# Altium PCB PCB1.PcbDoc
Units mm, origin at the board's own origin, x right, y up, seen from the top; angles counter-clockwise.
Board outline 98.12 x 55.73 mm, 2 copper layers (Top Layer, Bottom Layer); 32 components, 28 nets, 148 pads, 16 vias.
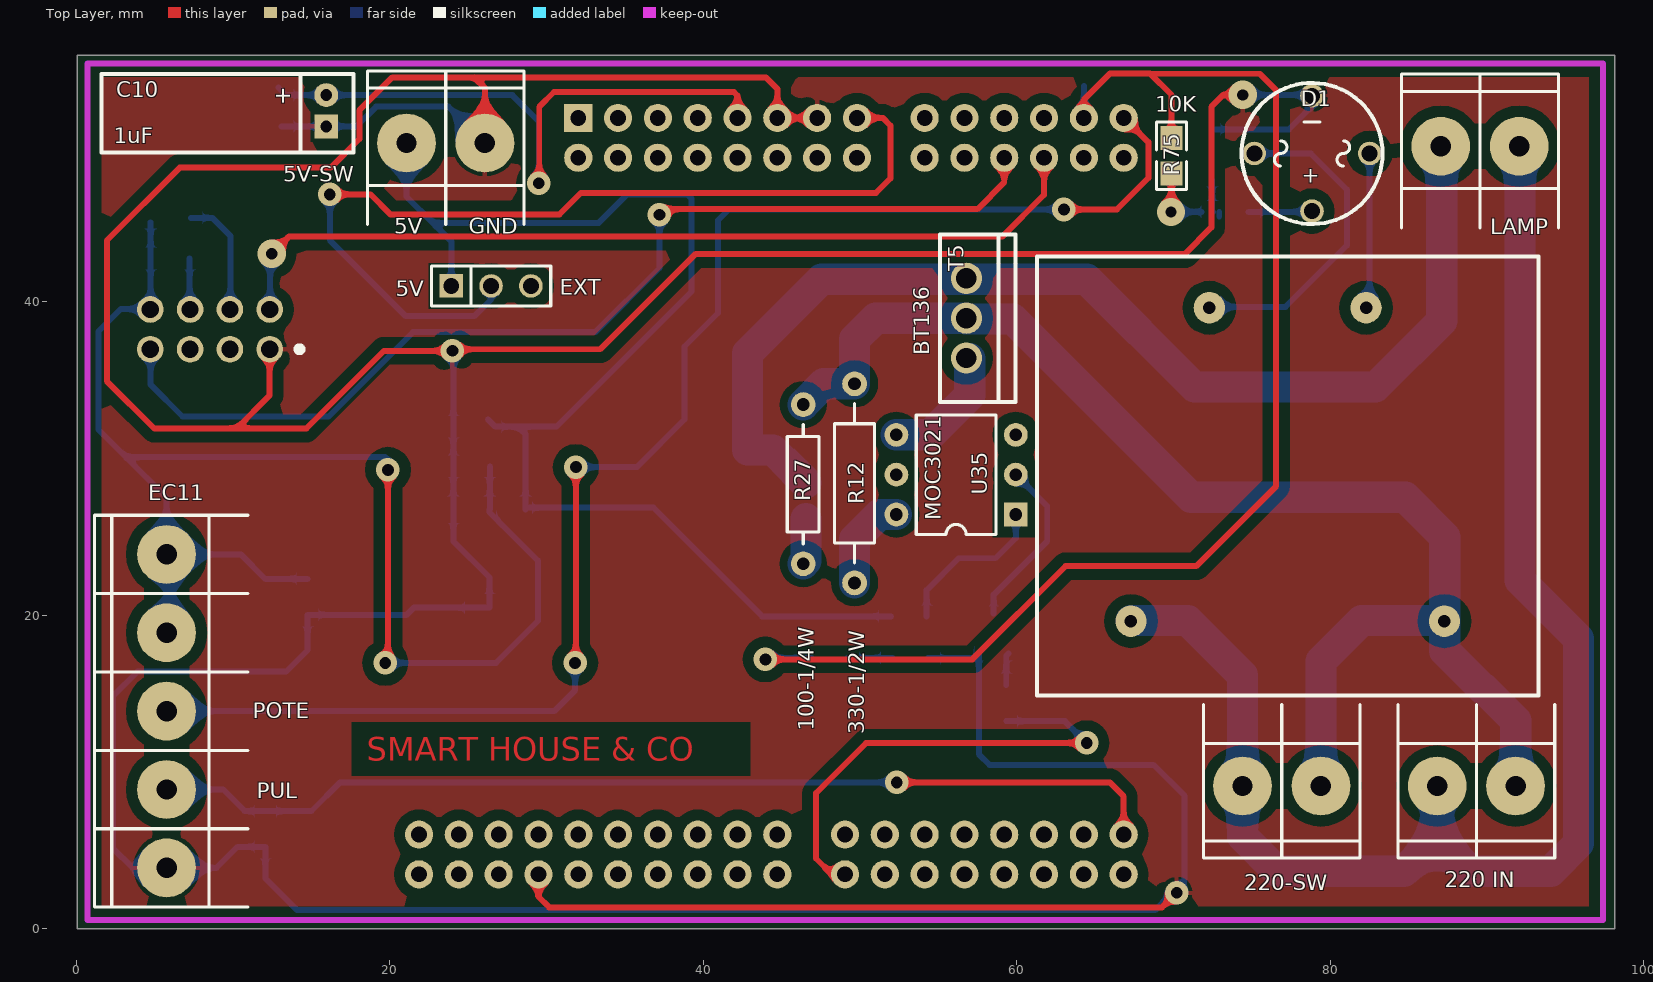
[diagram p0: Top Layer view]
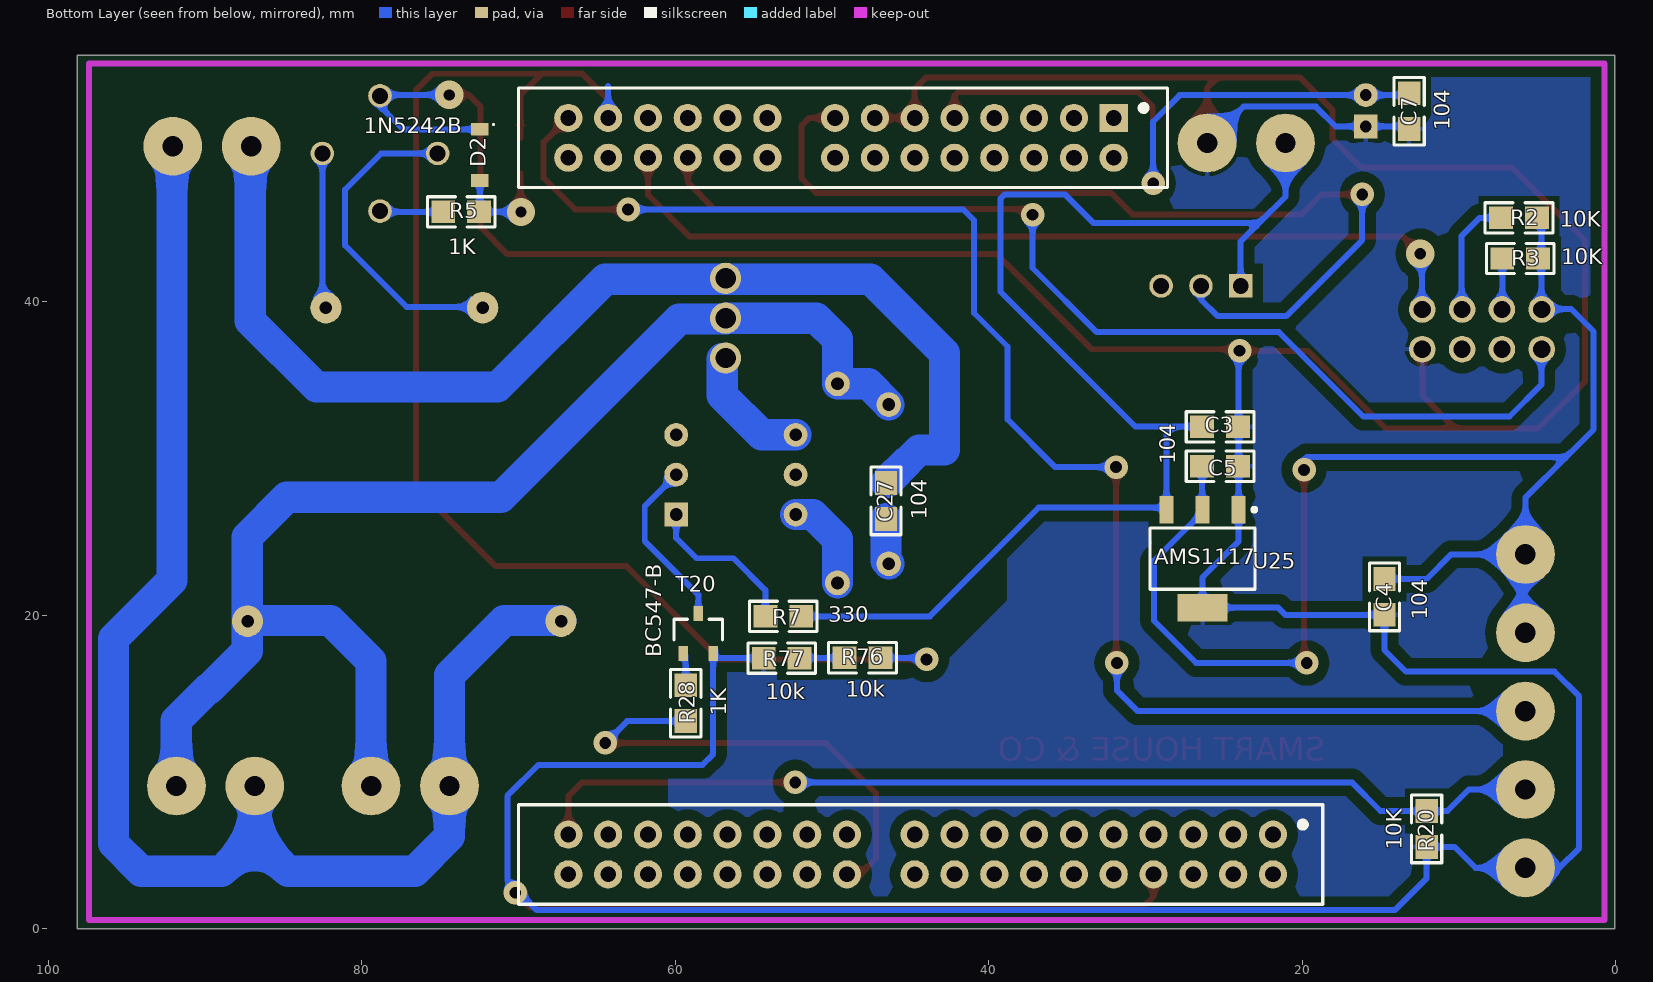
[diagram p1: Bottom Layer view, seen from below]

## Layer stack, top to bottom
Top Solder: solder mask 0.0102, Solder Resist, Dk 3.5
Top Layer: signal copper 0.0356
Dielectric 1: dielectric 0.32, FR-4, Dk 4.8
Bottom Layer: signal copper 0.0356
Bottom Solder: solder mask 0.0102, Solder Resist, Dk 3.5

## Board outline
0.051,0 98.171,0 98.171,55.728 0.051,55.728

## Design rules (kind name [scope] priority, off if disabled: settings)
Clearance POLYGON [All vs InPolygon] p1: gap=0.7
Clearance [All] p2: gap=0.254
PolygonConnect [All] p1: connectstyle=Relief reliefconductorwidth=0.254 reliefentries=4 polygonreliefangle="90 Angle" airgapwidth=0.254
RoutingVias [All] p1: holewidth=0.711 width=1.27 viastyle="Through Hole" minholewidth=0.711 minwidth=1.27 maxholewidth=0.711 maxwidth=1.27
SolderMaskExpansion [All] p1: expansion=0.102
UnpouredPolygon [All] p1: allowunpoured=FALSE
Width [All] p1: maxlimit=2 minlimit=0.254 preferedwidth=0.381 minimp=50.000000 maximp=50.000000 favimp=50.000000
29 further rules are at their usual default settings.

## Classes and differential pairs
component class esq: C3 C4 C5 C7 C10 C27 D1 D2 R2 R3 R5 R7 R12 R20 R27 R28 R75 R76 R77 T5 T20 U6 U25 U35 ""

## Components (designator, comment, footprint, x,y, rotation, side; value= is the part's Value field where it differs from the comment)
* "TRAFO" trafo 93.294,42.875 r180 top
C3 "" 0805 25.248,32.004 r180 bottom
C4 "104" 0805 14.757,21.158 r90 bottom
C5 "104" 0805 25.248,29.489 r180 bottom
C7 "104" 0805 13.183,52.146 r90 bottom
C10 "1uF" CAP100RP 15.951,52.172 r270 top
C27 "104" 0805 46.558,27.28 r90 bottom
D1 "" "PUENTE - W10M" 78.842,45.771 r180 top
D2 "1N5242B" Diodo 72.466,49.352 r270 bottom
J1 "220 IN" BORNERA2 89.332,9.093 r90 top
J2 "LAMP" BORNERA2 89.56,49.911 r270 top
J3 "220-SW" BORNERA2 76.911,9.093 r90 top
J4 "5V-SW" BORNERA2 23.571,50.114 r270 top
J20 "" JUMPER3 26.467,40.996 r0 top
J25 "EC11" BORNERA5 5.766,13.868 r0 top
R2 "10K" 0805 6.172,45.339 r0 bottom
R3 "10K" 0805 6.096,42.748 r0 bottom
R5 "1K" 0805 73.66,45.72 r180 bottom
R7 "330" 0805 53.111,19.914 r0 bottom
R12 "330-1/2W" RES500 49.657,22.047 r90 top
R20 "10K" 0805 12.065,6.35 r90 bottom
R27 "100-1/4W" RES400 46.38,23.266 r90 top
R28 "1K" 0805 59.334,14.376 r90 bottom
R75 "10K" 0805 69.875,49.301 r90 top
R76 "10k" 0805 48.057,17.272 r180 bottom
R77 "10k" 0805 53.213,17.247 r180 bottom
T5 "BT136" BT136 56.794,38.938 r270 top
T20 "BC547-B" SOT23 59.482,17.551 r180 bottom
U4 "" MICRO 45.872,28.473 r0 bottom
U6 "" ESP-01 12.344,39.497 r180 top
U25 "AMS1117" AMS1117 26.365,23.597 r270 bottom
U35 "MOC3021" MOC3021 59.944,26.467 r180 top

## Footprints (in the part's own frame and the unit in brackets; to place one, negate y for a bottom-side part, rotate by r counter-clockwise, add the part's x,y. Pads: shape width x height; smd on the part's side, far side on the other; paste and mask are expansions set on the pad)
0805 [mil] "Pasivo 0805"
  rect 60x56 smd: 1(-45,0) 2(45,0)
  silkscreen extent -85,-38 85,38, body extent -39,-25 39,25, height 15
AMS1117 [mm] "SOT223, 4-Leads, Body 6,50x7,00mm (avg), Pitch 2,30mm, IPC Medium Density"
  rect 1.75x0.9 smd: 1(-3.125,-2.3) 2(-3.125,2.3) 3(-3.125,0)
  rect 1.75x3.2 smd: 2(3.125,0)
  silkscreen extent -3.25,-3.35 1.95,3.42, body extent -3.48,-3.25 3.48,3.25, height 1.7
BORNERA2 [mm] "Bornera con Tornillos 5mm separaci�n"
  round 3.75 hole 1.3: 1(0,2.5) 2(0,-2.5)
  silkscreen extent -4.6,-5 5.2,5, body extent -3.76,-4.89 3.94,5.61, height 10
BORNERA5 [mm] "Bornera con Tornillos 5mm separaci�n"
  round 3.75 hole 1.3: 1(0,10) 2(0,5) 3(0,0) 4(0,-5) 5(0,-10)
  silkscreen extent -4.6,-12.5 5.2,12.5, body extent -3.76,-12.39 3.94,13.11, height 10.05
BT136 [mm]
  round 2 hole 1.3: 1(-2.54,0) 2(0,0) 3(2.54,0)
  silkscreen extent -5.33,-1.69 5.34,3.14, body extent -5.21,-1.65 5.46,3.18, height 22.76
CAP100RP [mil] "Body diameter 5mm"
  round 60 hole 30: 1(-39.37,0)
  rect 60x60 hole 30: 2(39.37,0)
  silkscreen extent -92,-565 105,68, body extent -97,-566 107,-65, height 220
Diodo [mm] "SODFL, 2-Leads, Body 1,60x3,60mm, IPC Medium Density"
  rect 0.81x1.12 smd: 1(-1.635,0) 2(1.635,0)
  silkscreen extent -1.99,0.81 -1.89,0.91, body extent -1.4,-0.85 1.4,0.85, height 1.3
ESP-01 [mm]
  round 1.7 hole 1.1: 1(0,2.54) 2(2.54,2.54) 3(5.08,2.54) 4(7.62,2.54) 5(0,0) 6(2.54,0) 7(5.08,0) 8(7.62,0)
  silkscreen extent -2.16,2.29 -1.65,2.79, body extent -3.43,-1.52 11.07,23.28, height 14.88
JUMPER3 [mm]
  rect 1.5x1.5 hole 1.016: 1(-2.54,0)
  round 1.5 hole 1.016: 2(0,0) 3(2.54,0)
  silkscreen extent -3.81,-1.27 3.81,1.27, body extent -3.81,-1.3 3.81,1.27, height 16.15
MICRO [mm]
  rect 1.8x1.8 hole 1: 1(-13.843,-23.241)
  round 1.8 hole 1: 2(-13.843,-20.701) 3(-11.303,-23.241) 4(-11.303,-20.701) 5(-8.763,-23.241) 6(-8.763,-20.701) 7(-6.223,-23.241) 8(-6.223,-20.701) 9(-3.683,-23.241) 10(-3.683,-20.701) 11(-1.143,-23.241) 12(-1.143,-20.701) 13(1.397,-23.241) 14(1.397,-20.701) 15(3.937,-23.241) 16(3.937,-20.701) 17(8.255,-23.241) 18(8.255,-20.701) 19(10.795,-23.241) 20(10.795,-20.701) 21(13.335,-23.241) 22(13.335,-20.701) 23(15.875,-23.241) 24(15.875,-20.701) 25(18.415,-23.241) 26(18.415,-20.701) 27(20.955,-23.241) 28(20.955,-20.701) 29(-24.003,22.479) 30(-24.003,25.019) 31(-21.463,22.479) 32(-21.463,25.019) 33(-18.923,22.479) 34(-18.923,25.019) 35(-16.383,22.479) 36(-16.383,25.019) 37(-13.843,22.479) 38(-13.843,25.019) 39(-11.303,22.479) 40(-11.303,25.019) 41(-8.763,22.479) 42(-8.763,25.019) 43(-6.223,22.479) 44(-6.223,25.019) 45(-3.683,22.479) 46(-3.683,25.019) 47(-1.143,22.479) 48(-1.143,25.019) 49(3.175,22.479) 50(3.175,25.019) 51(5.715,22.479) 52(5.715,25.019) 53(8.255,22.479) 54(8.255,25.019) 55(10.795,22.479) 56(10.795,25.019) 57(13.335,22.479) 58(13.335,25.019) 59(15.875,22.479) 60(15.875,25.019) 61(18.415,22.479) 62(18.415,25.019) 63(20.955,22.479) 64(20.955,25.019)
  silkscreen extent -27.18,-25.15 24.13,26.92, body extent -25.27,-24.51 22.23,26.29, height 1.5
MOC3021 [mil]
  rect 60x60 hole 32: 1(0,2)
  round 60 hole 32: 2(0,-98) 3(0,-198) 4(300,-198) 5(300,-98) 6(300,2)
  silkscreen extent 50,-248 250,52, body extent -5,-267 305,79, height 209
"PUENTE - W10M" [mm]
  round 1.5 hole 1.016: 1(0,0) 2(-3.677,-3.677) 3(0,-7.354) 4(3.677,-3.677)
  silkscreen extent -4.5,-8.18 4.5,0.82, body extent -6.58,-10.13 6.58,3.02, height 5.6
RES400 [mil]
  round 62 hole 32: 1(0,0) 2(400,0)
  silkscreen extent 50,-40 350,40, body extent -12,-45 412,46, height 96
RES500 [mil]
  round 62 hole 32: 1(0,0) 2(500,0)
  silkscreen extent 50,-50 450,50, body extent -5,-52 505,54, height 119
SOT23 [mm]
  rect 0.6x0.95 smd: 1(0,0) 2(0.95,2.55) 3(1.9,0)
  silkscreen extent -0.6,0.87 2.5,2.17, body extent -0.53,-0.25 2.47,2.88, height 1
trafo [mm]
  round 2 hole 0.8: 1(6.002,23.271) 5(26.002,23.271) 7(11.002,3.271) 9(21.002,3.271)
  silkscreen extent 0,0 32,28, body extent 0,0 32,28, height 36.58

## Part data
C3 C4 C5 C7 C27: library part CAP, "cap"
C10: library part CAPPOL, "Cap polarizado"
D1: library part PUENTE
D2: library part "DIODO SCHOTTKY", "Diodo"
J1 J2 J3 J4: library part Bornera_2, "Bornera de 2 pines"
J20: library part JUMPER3
J25: library part "BORNERA 5"
R2 R3 R5 R7 R12 R20 R27 R28 R75 R76 R77: library part RES, "Resistencia"
T20: library part "TRANSISTOR NPN"
U4: library part FRDM-KL25Z, "FRDM-KL25Z"
U6: library part ESP-01
U35: "OPTO-ACOPLADOR"

## Via types
v1: diameter 1.5, hole 0.75, Top Layer to Bottom Layer, 13 vias
v2: diameter 1.8, hole 0.711, Top Layer to Bottom Layer, 3 vias

## Nets (pads, with @x,y where several pads share a name; then routed paths per layer and width w, separated by ;. In a path a pad name is that pad's centre, name@x,y a point inside that pad or via, vN(x,y) a via of type N, cw(c..) or ccw(c..) an arc to the next point about the centre after c; other vN are vias at no path point)
3V3: C4.2 C5.1 J25.1 J25.2 R2.1 R3.1 U6.8 U25.3 | length 92.4
  Top Layer w0.381: v1(19.71,16.942) 19.888,17.12 v1(19.888,29.261)
  Bottom Layer w0.381: R2.1@4.75,45.06 4.75,39.522 2.845,39.522 1.422,38.1 1.422,31.826 3.175,30.074 ; J25.2@5.994,17.598 5.994,22.598 J25.1@6.292,22.301 ; C4.2 12.065,22.301 10.498,23.868 J25.1 5.766,27.483 3.175,30.074 ; v1(19.71,16.942) 26.772,16.942 29.464,19.634 29.464,23.47 26.365,26.568 U25.3 26.391,26.747 C5.1 ; v1(19.888,29.261) 19.888,29.87 19.685,30.074 3.175,30.074
5V: C3.1 J4.2 J20.1 R7.1 U25.1 | length 82.1
  Bottom Layer w0.381: J4.2 21.071,46.696 22.748,45.02 ; J20.1 23.927,43.84 22.748,45.02 ; C3.1@26.264,32.487 26.735,32.015 28.194,32.015 ; R7.1 43.764,19.914 36.83,26.848 28.791,26.848 U25.1 28.665,31.544 28.194,32.015 ; 22.748,45.02 33.336,45.02 35.154,46.838 38.989,46.838 39.268,46.558 39.268,40.64 30.644,32.015 28.194,32.015
CRUCE_CERO: D2.2 R5.2 R75.1 | length 6.7
  Top Layer w0.381: v2(69.85,45.72) 69.875,45.745 R75.1
  Bottom Layer w0.381: v2(69.85,45.72) R5.2@71.806,45.72 ; D2.2 72.466,45.771 R5.2 ; R5.2@72.923,45.415 R5.2@72.923,45.72
FASE: *.1 J1.2 J3.2 R12.2 R27.2 T5.2 | length 85.4
  Bottom Layer w2: R27.2 47.701,34.747 R12.2 49.657,37.592 51.003,38.938 T5.2 56.744,38.887 59.741,38.887 71.12,27.508 84.785,27.508 87.318,24.976 *.1@87.318,19.655 ; J3.2 79.411,17.054 82.012,19.655 *.1@87.318,19.655 ; J1.2@91.832,9.195 91.832,13.273 89.814,15.291 89.738,15.291 87.318,17.711 *.1@87.318,19.655
GND: C3.2 C4.1 C5.2 C7.1 C10.2 D1.3 D2.1 J4.1 J25.5 R20.1 R77.1 T20.3 U4.11 U4.13 U4.36 U6.1 U25.2 | length 386.3
  Top Layer w0.381: U6.1 12.344,34.011 10.236,31.902 ; v1@23.52,36.957 33.426,36.957 39.497,43.028 70.714,43.028 72.415,44.729 72.415,52.426 73.177,53.188 v2(74.422,53.188) ; v1(24.003,36.855) 19.634,36.855 14.681,31.902 10.236,31.902 ; J4.1 26.071,53.634 25.4,54.305 ; U4.36 29.489,2.032 30.175,1.346 69.266,1.346 v1(70.206,2.286) ; U4.13 U4.11 44.729,53.569 43.993,54.305 25.4,54.305 ; 10.236,31.902 4.978,31.902 1.956,34.925 1.956,43.891 6.604,48.539 16.231,48.539 18.059,50.368 18.059,52.197 20.168,54.305 25.4,54.305
  Bottom Layer w0.381: C7.1@13.09,51.172 C10.2 17.872,51.172 19.134,52.434 23.752,52.434 J4.1 ; v1(24.003,36.855) 24.065,36.793 24.065,26.722 24.065,24.703 26.365,22.403 26.365,20.472 21.538,20.472 21.082,20.015 C4.1 14.757,17.755 13.386,16.383 3.912,16.383 2.337,14.808 2.337,5.131 3.599,3.868 J25.5 8.948,3.868 10.287,5.207 R20.1 12.065,3.2 14.097,1.168 68.834,1.168 70.714,3.048 70.714,8.458 68.732,10.439 58.268,10.439 57.582,11.125 T20.3 57.277,17.247 R77.1 ; D2.1 77.378,50.987 79.033,52.642 78.487,53.188 v2(74.422,53.188)
LAMPARA: R28.1 U4.50 | length 30.7
  Top Layer w0.381: U4.50 48.209,3.454 47.193,4.47 47.193,8.636 50.394,11.836 v1(64.465,11.836)
  Bottom Layer w0.381: R28.1 63.068,13.233 v1(64.465,11.836)
Net*_7: *.7 D1.2 | length 9.9
  Bottom Layer w0.381: *.7@82.318,39.655 82.519,39.856 D1.2
Net*_9: *.9 D1.4 | length 20.8
  Bottom Layer w0.381: *.9@72.318,39.655 77.146,39.655 81.077,43.586 81.077,47.142 78.771,49.448 D1.4
NetC7_2: C7.2 C10.1 U4.9 | length 40.9
  Top Layer w0.381: v1(29.515,47.549) 29.54,47.574 29.54,52.426 30.48,53.365 41.961,53.365 42.189,53.137 U4.9
  Bottom Layer w0.381: C7.2@12.903,53.645 13.376,53.172 C10.1 27.829,53.172 29.515,51.486 v1(29.515,47.549)
NetC27_1: C27.1 R27.1 | length 2.9
  Bottom Layer w2: R27.1 46.558,23.444 C27.1
NetC27_2: C27.2 J2.2 T5.1 | length 72.1
  Bottom Layer w2: C27.2 44.45,30.531 42.824,30.531 42.824,36.703 47.549,41.427 64.465,41.427 71.349,34.544 82.895,34.544 87.111,38.76 J2.2@87.111,49.225
NetD1_1: D1.1 R5.1 | length 4.1
  Bottom Layer w0.381: R5.1 78.791,45.72 D1.1
NetJ25_3: J25.3 U4.27 | length 95.7
  Top Layer w0.381: v1(31.826,16.942) 31.877,16.993 v1(31.877,29.439) ; v1(63.017,45.872) 66.396,45.872 68.402,47.879 68.402,50.165 66.853,51.714 U4.27
  Bottom Layer w0.381: J25.3 30.505,13.868 31.826,15.189 v1(31.826,16.942) ; v1(31.877,29.439) 35.763,29.439 38.811,32.487 38.811,37.135 40.945,39.268 40.945,45.187 41.631,45.872 v1(63.017,45.872)
NetJ25_4: J25.4 R20.2 U4.63 | length 65.2
  Top Layer w0.381: v1(52.349,9.322) 65.938,9.322 66.827,8.433 U4.63
  Bottom Layer w0.381: J25.4 9.369,8.868 10.744,7.493 R20.2 15.011,7.493 16.84,9.322 v1(52.349,9.322)
NetR2_2: R2.2 U6.6 | length 7.7
  Bottom Layer w0.381: R2.2 8.687,45.339 9.83,44.196 U6.6@9.83,39.522
NetR3_2: R3.2 U6.7 | length 3.2
  Bottom Layer w0.381: U6.7@7.239,39.573 R3.2
NetR7_2: R7.2 U35.1 | length 10.2
  Bottom Layer w0.381: R7.2 54.254,21.59 56.286,23.622 58.649,23.622 59.944,24.917 U35.1
NetR12_1: R12.1 U35.6 | length 6.1
  Bottom Layer w2: R12.1 49.657,24.841 51.232,26.416 U35.6
NetR28_2: R28.2 T20.1 | length 2.1
  Bottom Layer w0.381: R28.2 59.334,17.404 T20.1
NetR75_2: R75.2 R76.2 U4.25 | length 86.7
  Top Layer w0.381: v1(43.967,17.17) 57.175,17.17 63.119,23.114 71.45,23.114 76.556,28.219 76.556,53.492 75.514,54.534 68.529,54.534 ; U4.25@64.338,51.714 U4.25 64.287,52.883 65.964,54.559 68.504,54.559 68.529,54.534 ; R75.2 69.875,53.188 68.529,54.534
  Bottom Layer w0.381: v1(43.967,17.17) 44.069,17.272 R76.2 ; U4.25 64.287,53.746
NetR76_1: R76.1 R77.2 | length 2.9
  Bottom Layer w0.381: R76.1 52.045,17.272 R77.2
NetT5_3: T5.3 U35.4 | length 8.1
  Bottom Layer w2: U35.4 54.483,31.496 56.998,34.011 T5.3@56.998,36.347
NetT20_2: T20.2 U35.2 | length 11.1
  Bottom Layer w0.381: T20.2 58.532,21.295 61.951,24.714 61.951,26.949 U35.2
NEUTRO: *.5 J1.1 J2.1 J3.1 | length 92.4
  Bottom Layer w2: *.5@67.318,19.655 70.917,19.655 74.411,16.161 J3.1 74.411,5.878 76.632,3.658 84.709,3.658 86.832,5.78 ; J1.1@86.832,9.195 86.832,5.78 ; J2.1@92.111,49.225 92.111,22.225 95.845,18.491 95.845,5.421 94.082,3.658 88.955,3.658 86.832,5.78
RXD: U4.22 U6.4 | length 67.7
  Top Layer w0.381: v1@36.957,45.364 37.49,45.898 57.506,45.898 59.207,47.6 U4.22
  Bottom Layer w0.381: U6.4@4.75,36.982 4.75,34.696 6.782,32.664 16.104,32.664 21.489,38.05 33.122,38.05 37.211,42.139 v1(37.211,45.542)
TXD: U4.24 U6.5 | length 56.8
  Top Layer w0.381: v2(12.471,43.053) 13.564,44.145 59.08,44.145 61.747,46.812 U4.24
  Bottom Layer w0.381: U6.5@12.37,39.522 12.37,42.951 v2(12.471,43.053)
USB: J20.3
VDD: J20.2 U4.15 | length 59.5
  Top Layer w0.381: v1(16.18,46.838) 18.771,46.838 20.041,45.568 30.836,45.568 32.207,46.939 51.029,46.939 51.943,47.854 51.943,51.232 51.46,51.714 U4.15
  Bottom Layer w0.381: v1(16.18,46.838) 16.18,43.917 21.031,39.065 25.4,39.065 26.467,40.132 J20.2
pads on no net: U4.1 U4.2 U4.3 U4.4 U4.5 U4.6 U4.7 U4.8 U4.10 U4.12 U4.14 U4.16 U4.17 U4.18 U4.19 U4.20 U4.21 U4.23 U4.26 U4.28 U4.29 U4.30 U4.31 U4.32 U4.33 U4.34 U4.35 U4.37 U4.38 U4.39 U4.40 U4.41 U4.42 U4.43 U4.44 U4.45 U4.46 U4.47 U4.48 U4.49 U4.51 U4.52 U4.53 U4.54 U4.55 U4.56 U4.57 U4.58 U4.59 U4.60 U4.61 U4.62 U4.64 U6.2 U6.3 U35.3 U35.5

## Polygon pours and split planes (outlines as drawn)
GND on Bottom Layer "POLYGON" (solid, remove dead copper, pour order 4): 62.001,-4.064 60.452,-2.515 60.452,16.916 42.85,16.916 42.189,17.577 38.811,20.955 38.811,45.669 38.811,60.096 39.395,60.681 37.567,58.852 -3.886,58.852 -3.886,-4.928 -3.023,-5.791 0.051,-2.718 55.448,-2.718
GND on Top Layer "POLYGON" (solid, remove dead copper, pour order 6): -3.607,58.649 99.212,58.649 99.416,58.852 103.353,54.915 103.353,-2.616 -6.477,-2.616 -7.544,-3.683

## Keep-outs
Keep-Out Layer:
  lines w0.381: 0.732,0.533 97.409,0.533 97.409,55.194 0.732,55.194 0.732,0.533

## Other copper
Top Layer:
  text "SMART HOUSE & CO" at 18.542,10.693 h1.5

## Silkscreen, mask and mechanical layers (free items; w line width, h text height)
Top Overlay:
  text "5V" at 20.295,44.323 h1
  text "GND" at 25.044,44.323 h1
  text "EXT" at 30.861,40.437 h1
  text "5V" at 20.371,40.335 h1
  text "POTE" at 11.252,13.411 h1
  text "PUL" at 11.532,8.306 h1
Mechanical 32:
  the board outline again, w0.381

## Text inside footprints (layer, text, board x,y; h text height)
C10: Top Overlay "+" at 12.776,53.696 h1.02 r270
D1: Top Overlay "+" at 79.342,48.448 h1 r180